# Altium PCB H_Bridge.PcbDoc
Units mm, origin at the board's own origin, x right, y up, seen from the top; angles counter-clockwise.
Board outline 40.13 x 76.88 mm, 2 copper layers (Top Layer, Bottom Layer), stack 1.58 mm thick; 14 components, 16 nets, 61 pads, 263 vias.
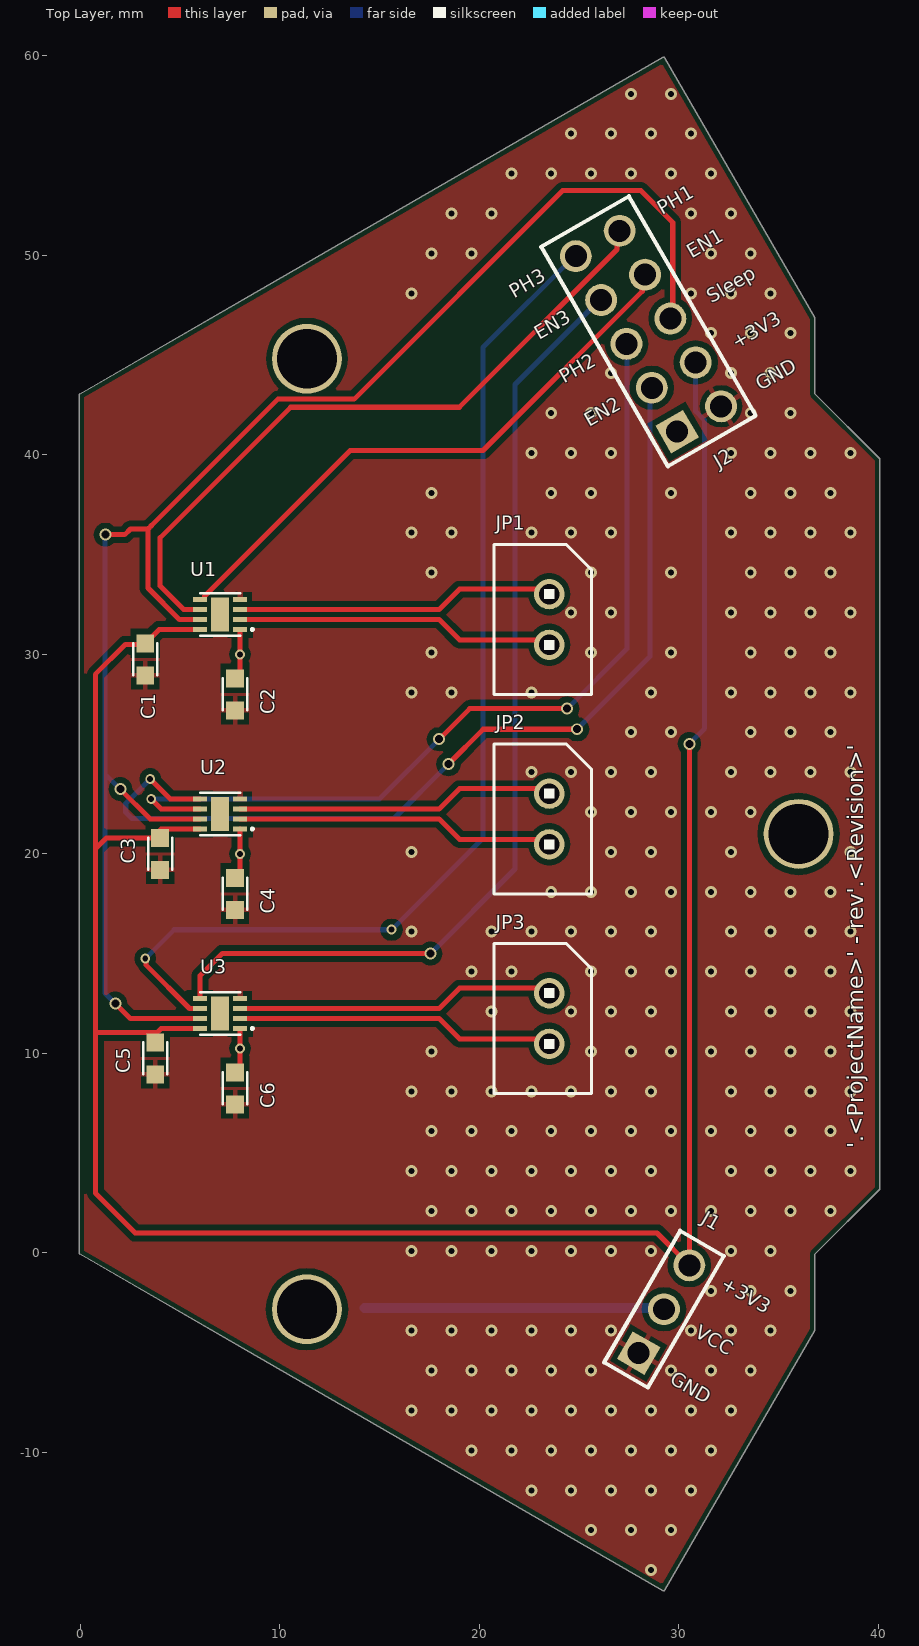
[diagram p0: Top Layer view]
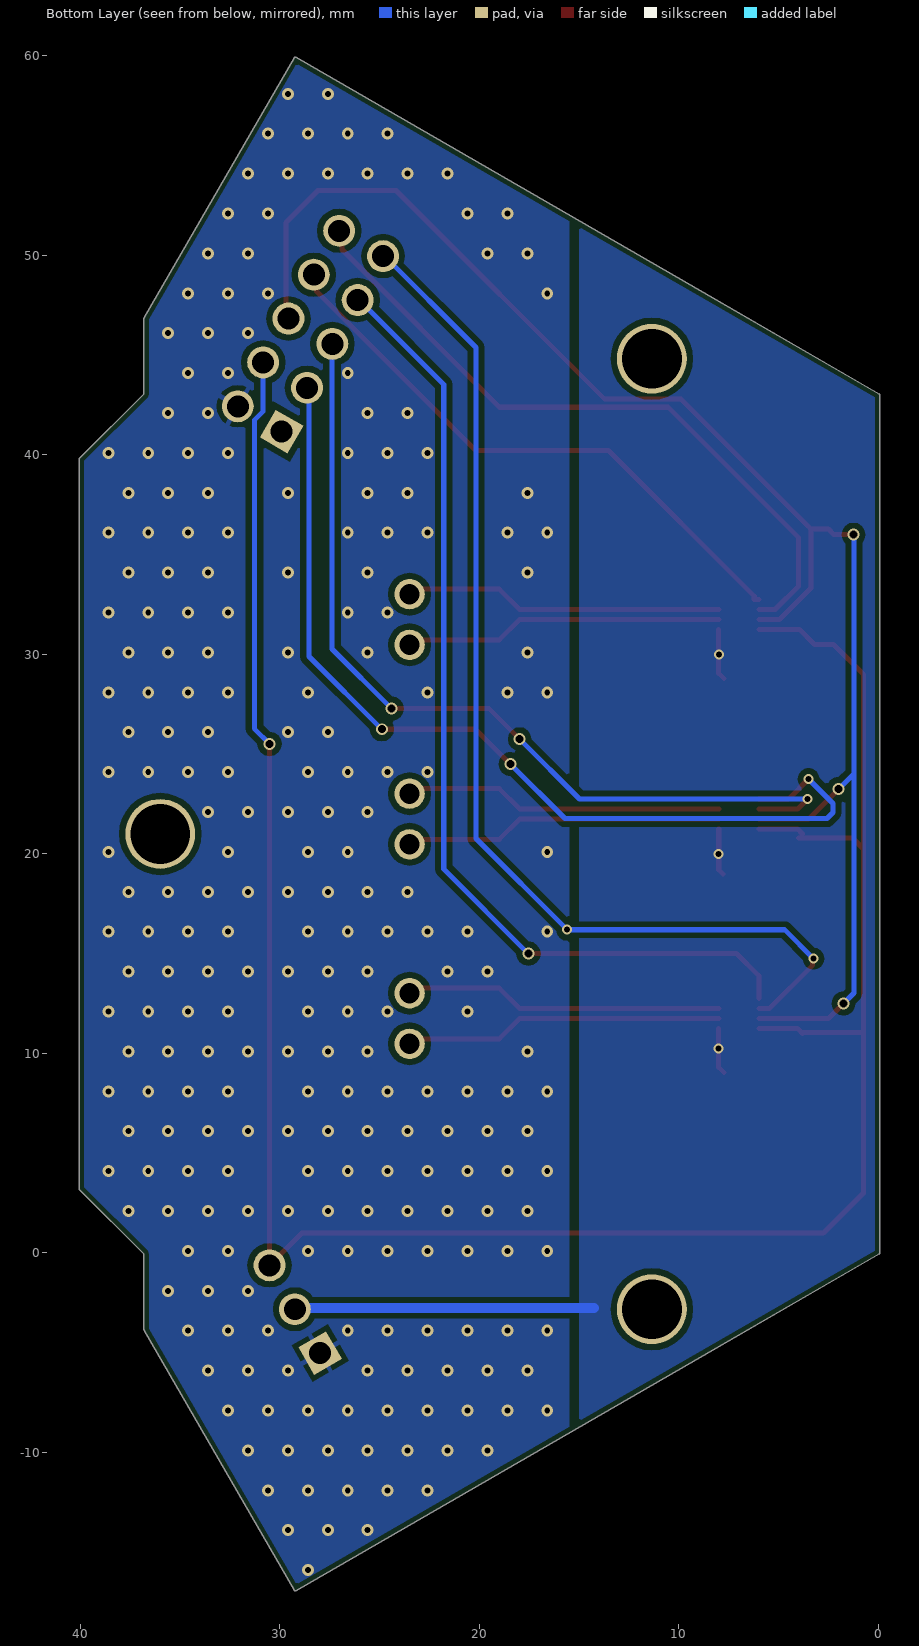
[diagram p1: Bottom Layer view, seen from below]
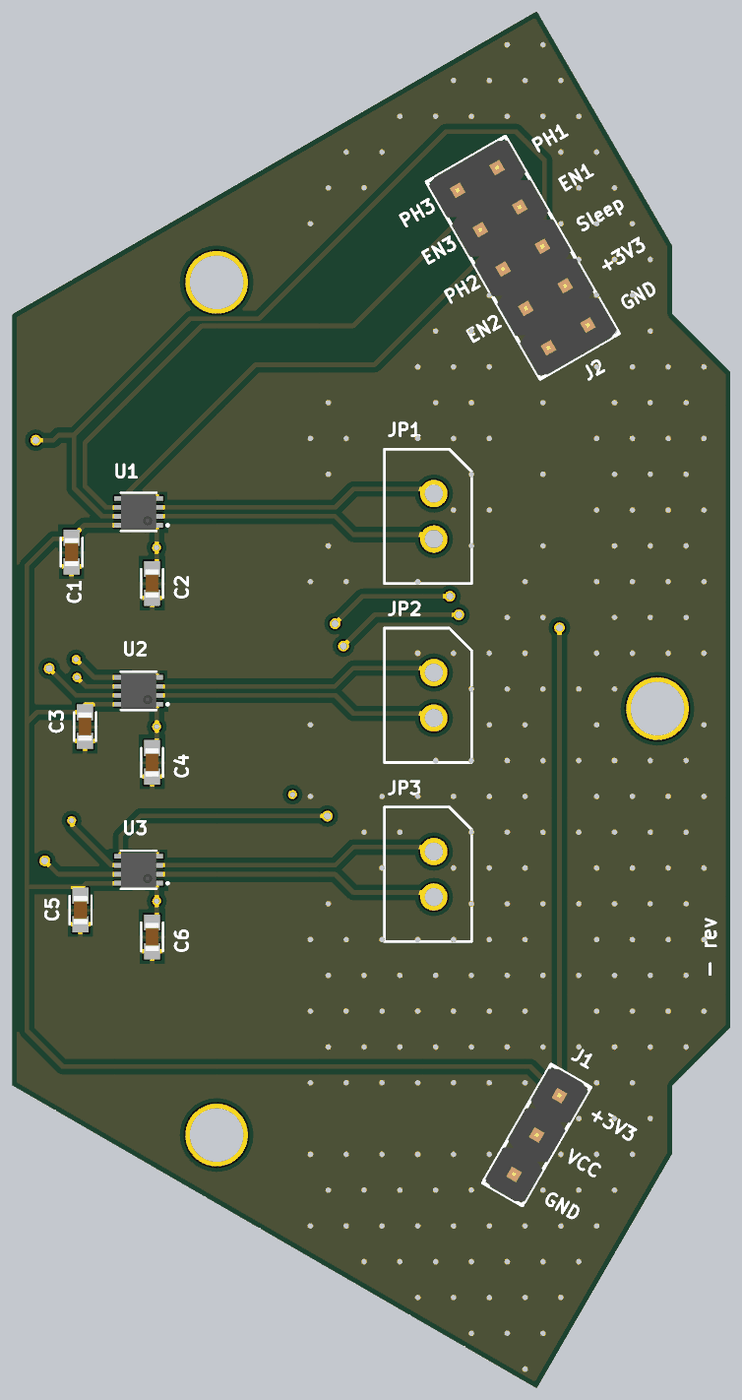
[diagram p2: 3D render of the assembled board from above, using the file's embedded part models]

## Layer stack, top to bottom
Top Solder: solder mask 0.0102, Solder Resist, Dk 3.5
Top Layer: signal copper 0.0356
Dielectric 1: dielectric 1.5086, FR-4, Dk 4.8
Bottom Layer: signal copper 0.0356
Bottom Solder: solder mask 0.0102, Solder Resist, Dk 3.5

## Board outline
-0.032,-0.055 cw(c0,0) -0.064,0 -0.064,43 cw(c0,43) -0.032,43.055 8.628,48.055 29.196,59.93 cw(c29.228,59.875) 29.284,59.907 36.805,46.878 cw(c36.75,46.847) 36.814,46.847 36.814,43.061 40.045,39.83 cw(c40,39.784) 40.064,39.784 40.064,10 40.064,3.216 cw(c40,3.216) 40.045,3.17 36.814,-0.061 36.814,-3.847 cw(c36.75,-3.847) 36.805,-3.878 29.284,-16.907 cw(c29.228,-16.875) 29.196,-16.93 8.628,-5.055

## Design rules (kind name [scope] priority, off if disabled: settings)
BoardOutlineClearance [All] p1: gap=0.254 ignorepadtopadclearanceinfootprint=FALSE except(0: Arc-SplitContinuation Track-SplitContinuation SMDPad-OutlineEdge SMDPad-SplitContinuation THPad-SplitContinuation Via-SplitContinuation Fill-SplitContinuation Poly-SplitContinuation Region-SplitContinuation Text-SplitContinuation)
Clearance Clearance_RF [InNet('WLAN_RF')] p1: gap=0.15 ignorepadtopadclearanceinfootprint=FALSE except(0: Arc-Hole Track-Hole SMDPad-Hole THPad-Hole Via-Hole Fill-Hole Poly-Hole Region-Hole Text-Hole; 0.8: Arc-Poly Track-Poly SMDPad-Poly THPad-Poly Via-Poly Fill-Poly Poly-Poly)
Clearance [All] p2: gap=0.15 ignorepadtopadclearanceinfootprint=FALSE except(0: Arc-Hole Track-Hole SMDPad-Hole THPad-Hole Via-Hole Fill-Hole Poly-Hole Region-Hole Text-Hole; 0.3: Arc-Poly Track-Poly SMDPad-Poly THPad-Poly Via-Poly Fill-Poly Poly-Poly)
DiffPairsRouting [All] p1: maxlimit=0.254 minlimit=0.25 mostfreqgap=0.25 toplayer_minwidth=0.25 toplayer_maxwidth=0.25 toplayer_prefwidth=0.25 bottomlayer_minwidth=0.25 bottomlayer_maxwidth=0.25 bottomlayer_prefwidth=0.25 maxuncoupledlength=12.7
HoleSize [All] p1: absolutevalues=TRUE maxlimit=10 minlimit=0.025 maxpercent=80.000 minpercent=20.000
MinimumSolderMaskSliver [All] p1: minsoldermaskwidth=0.04
PlaneClearance PlaneClearance_RF [InNet('WLAN_RF')] p1: clearance=0.8
PlaneClearance [All] p2: clearance=0.5
PlaneConnect [All] p1: planeconnectstyle=Relief reliefexpansion=0.508 reliefentries=2 reliefconductorwidth=0.254 reliefairgap=0.254
PolygonConnect PolygonConnect_vias [All vs IsVia] p1: connectstyle=Direct reliefconductorwidth=0.254 reliefentries=4 polygonreliefangle="90 Angle" airgapwidth=0.254
PolygonConnect [All] p2: connectstyle=Relief reliefconductorwidth=0.25 reliefentries=4 polygonreliefangle="90 Angle" airgapwidth=0.25
RoutingVias [All] p1: holewidth=0.7 width=0.5 viastyle="Through Hole" minholewidth=0.4 minwidth=0.6 maxholewidth=0.5 maxwidth=0.8
SilkToSolderMaskClearance [IsPad] p1: minsilkscreentomaskgap=0 clearancetoexposedcopper=TRUE
SolderMaskExpansion SolderMaskExpansion_Vias [IsVia] p1: expansion=-10
SolderMaskExpansion [All] p2: expansion=0.1
UnpouredPolygon [All] p1: allowunpoured=TRUE allowshelved=TRUE
Width [All] p1: maxlimit=2 minlimit=0.1 preferedwidth=0.25 minimp=50.000000 maximp=50.000000 favimp=50.000000
23 further rules are at their usual default settings.

## Components (designator, comment, footprint, x,y, rotation, side; value= is the part's Value field where it differs from the comment)
C1 "C-EUC0603" C0603 3.25,29.75 r270 top value=100nF
C2 "C-EUC0603" C0603 7.75,28 r270 top value=100nF
C3 "C-EUC0603" C0603 4,20 r270 top value=100nF
C4 "C-EUC0603" C0603 7.75,18 r270 top value=100nF
C5 "C-EUC0603" C0603 3.75,9.75 r270 top value=100nF
C6 "C-EUC0603" C0603 7.75,8.25 r270 top value=100nF
J1 "03p" 61300311121 29.25,-2.822 r60 top
J2 "10p" 61301021121 28.471,46.2 r120 top
JP1 "CONECT_BAT" CONECT_BAT_PCK 23.5,31.75 r270 top
JP2 "CONECT_BAT" CONECT_BAT_PCK 23.5,21.75 r270 top
JP3 "CONECT_BAT" CONECT_BAT_PCK 23.5,11.75 r270 top
U1 "DRV8838DSGT" SON50P200X200X80-9N 7,32 r180 top
U2 "DRV8838DSGT" SON50P200X200X80-9N 7,22 r180 top
U3 "DRV8838DSGT" SON50P200X200X80-9N 7,12 r180 top

## Footprints (in the part's own frame and the unit in brackets; to place one, negate y for a bottom-side part, rotate by r counter-clockwise, add the part's x,y. Pads: shape width x height; smd on the part's side, far side on the other; paste and mask are expansions set on the pad)
61300311121 [mm] "3 pins, 1 row, straight, gold plating"
  rect 1.6x1.6 hole 1.1: 1(-2.54,0)
  round 1.6 hole 1.1: 2(0,0) 3(2.54,0)
  silkscreen extent -3.81,-1.27 3.81,1.27, body extent -3.81,-1.27 3.81,1.27, height 8.57
61301021121 [mm] "10 pins, dual pin, straight, gold plating"
  rect 1.6x1.6 hole 1.1: 1(-5.08,1.27)
  round 1.6 hole 1.1: 2(-2.54,1.27) 3(0,1.27) 4(2.54,1.27) 5(5.08,1.27) 6(-5.08,-1.27) 7(-2.54,-1.27) 8(0,-1.27) 9(2.54,-1.27) 10(5.08,-1.27)
  silkscreen extent -6.35,-2.54 6.35,2.54, body extent -6.35,-2.54 6.35,2.54, height 8.57
C0603 [mm]
  rect 0.9x0.9 smd: 1(-0.8,0) 2(0.8,0)
  silkscreen extent -0.8,-0.61 0.8,0.61, body extent -0.8,-0.4 0.8,0.4, height 0.8
CONECT_BAT_PCK [mil]
  round 60 hole 40: 1(50,0) 2(-50,0)
  silkscreen extent -148,-109 148,83
SON50P200X200X80-9N [mm]
  rect 0.71x0.26 smd: 1(-1.005,0.75) 2(-1.005,0.25) 3(-1.005,-0.25) 4(-1.005,-0.75) 5(1.005,-0.75) 6(1.005,-0.25) 7(1.005,0.25) 8(1.005,0.75)
  rect 0.9x1.7 smd: 9(0,0)
  silkscreen extent -1.67,-1.07 1,1.07, body extent -1,-1 1,1, height 0.77

## Part data
C1 C2 C3 C4 C5 C6: Part Number=06033C104KAT2A, Família=Capacitor, Vendor=AVX
J1: library part 61300311121, "WR-PHD 2.54 mm THT Pin Header, 03p", Part Number=61300311121, Vendor="Wurth Elektronik"
J2: library part 61301021121, "WR-PHD 2.54 mm THT Dual Pin Header, 10p", Part Number=61301021121, Vendor="Wurth Elektronik"
U1 U2 U3: "1.8A Low Voltage Brushed DC Motor Driver 8-WSON -40 to 85", Package="WSON-8 Texas Instruments", Availability=Good, MF="Texas Instruments", MP=DRV8838DSGT, Price="0.98 USD", SnapEDA_Link=https://www.snapeda.com/parts/DRV8838DSGT/Texas%20Instruments/view-part/?ref=snap

## Free pads (board coordinates)
  round 3.5 hole 3: ""(11.356,-2.822) ""(11.356,44.822) ""(36,21)

## Via types
v1: diameter 0.6, hole 0.3, Top Layer to Bottom Layer, tented both sides, 247 vias
v2: diameter 0.6, hole 0.4, Top Layer to Bottom Layer, 9 vias
v3: diameter 0.5, hole 0.3, Top Layer to Bottom Layer, 4 vias
v4: diameter 0.5/0.5 (per signal layer), hole 0.3, Top Layer to Bottom Layer, 3 vias

## Nets (pads, with @x,y where several pads share a name; then routed paths per layer and width w, separated by ;. In a path a pad name is that pad's centre, name@x,y a point inside that pad or via, vN(x,y) a via of type N, cw(c..) or ccw(c..) an arc to the next point about the centre after c; other vN are vias at no path point)
+3V3: C1.1 C3.1 C5.1 J1.3 J2.7 U1.8 U2.8 U3.8 | length 120.3
  Top Layer w0.25: 0.75,11 0.8,11.05 3.75,11.05 ; 0.75,20.25 1.3,20.8 C3.1 ; 2.25,30.5 3.2,30.5 C1.1 3.95,31.25 U1.8
  Top Layer w0.254: 2.25,30.5 0.75,29 0.75,20.25 0.75,11 0.75,3 2.75,1 28.898,1 J1.3 v2(30.52,25.52) ; C5.1@3.8,11 4.05,11.25 U3.8 ; C3.1@3.8,21 4.05,21.25 U2.8
  Bottom Layer w0.254: v2(30.52,25.52) 31.281,26.281 31.281,41.742 30.841,42.182 J2.7
EN1: J2.9 U1.5 | length 29.8
  Top Layer w0.254: U1.5 6.22,32.75 6.223,32.753 6.223,32.915 13.525,40.217 20.178,40.217 28.163,48.202 28.163,48.977 J2.9@28.421,49.235
EN2: J2.2 U2.5 | length 48.5
  Top Layer w0.254: v3(3.5,23.75) 4.5,22.75 5.992,22.75 U2.5@5.995,22.753 ; v2(18.449,24.5) 18.449,24.507 20.192,26.25 v2(24.894,26.25)
  Bottom Layer w0.254: v3(3.5,23.75) 2.273,22.523 2.273,22.082 2.582,21.773 15.644,21.773 ; 15.715,21.773 18.442,24.5 v2(18.449,24.5) ; v2(24.894,26.25) 28.541,29.898 28.541,43.346 J2.2@28.761,43.565
EN3: J2.4 U3.5 | length 49.7
  Top Layer w0.254: U3.5@5.995,12.761 5.995,13.895 7.112,15.012 v2@17.547,15.012
  Bottom Layer w0.254: v2(17.547,15) 21.789,19.241 21.789,43.532 J2.4@26.221,47.965
GND: C1.2 C2.2 C3.2 C4.2 C5.2 C6.2 J1.1 J2.6 U1.4 U2.4 U3.4
  other v1: 28.6,-15.9 25.6,-13.9 27.6,-13.9 29.6,-13.9 22.6,-11.9 24.6,-11.9 26.6,-11.9 28.6,-11.9 30.6,-11.9 19.6,-9.9 21.6,-9.9 23.6,-9.9 25.6,-9.9 27.6,-9.9 29.6,-9.9 31.6,-9.9 16.6,-7.9 18.6,-7.9 20.6,-7.9 22.6,-7.9 24.6,-7.9 26.6,-7.9 28.6,-7.9 30.6,-7.9 32.6,-7.9 17.6,-5.9 19.6,-5.9 21.6,-5.9 23.6,-5.9 25.6,-5.9 29.6,-5.9 31.6,-5.9 33.6,-5.9 16.6,-3.9 18.6,-3.9 20.6,-3.9 22.6,-3.9 24.6,-3.9 26.6,-3.9 30.6,-3.9 32.6,-3.9 34.6,-3.9 31.6,-1.9 33.6,-1.9 35.6,-1.9 16.6,0.1 18.6,0.1 20.6,0.1 22.6,0.1 24.6,0.1 26.6,0.1 28.6,0.1 32.6,0.1 34.6,0.1 17.6,2.1 19.6,2.1 21.6,2.1 23.6,2.1 25.6,2.1 27.6,2.1 29.6,2.1 31.6,2.1 33.6,2.1 35.6,2.1 37.6,2.1 16.6,4.1 18.6,4.1 20.6,4.1 22.6,4.1 24.6,4.1 26.6,4.1 28.6,4.1 32.6,4.1 34.6,4.1 36.6,4.1 38.6,4.1 17.6,6.1 19.6,6.1 21.6,6.1 23.6,6.1 25.6,6.1 27.6,6.1 29.6,6.1 31.6,6.1 33.6,6.1 35.6,6.1 37.6,6.1 16.6,8.1 18.6,8.1 20.6,8.1 22.6,8.1 24.6,8.1 26.6,8.1 28.6,8.1 32.6,8.1 34.6,8.1 36.6,8.1 38.6,8.1 17.6,10.1 25.6,10.1 27.6,10.1 29.6,10.1 31.6,10.1 33.6,10.1 35.6,10.1 37.6,10.1 20.6,12.1 24.6,12.1 26.6,12.1 28.6,12.1 32.6,12.1 34.6,12.1 36.6,12.1 38.6,12.1 19.6,14.1 21.6,14.1 25.6,14.1 27.6,14.1 29.6,14.1 31.6,14.1 33.6,14.1 35.6,14.1 37.6,14.1 16.6,16.1 20.6,16.1 22.6,16.1 24.6,16.1 26.6,16.1 28.6,16.1 32.6,16.1 34.6,16.1 36.6,16.1 38.6,16.1 23.6,18.1 25.6,18.1 27.6,18.1 29.6,18.1 31.6,18.1 33.6,18.1 35.6,18.1 37.6,18.1 16.6,20.1 26.6,20.1 28.6,20.1 32.6,20.1 38.6,20.1 25.6,22.1 27.6,22.1 29.6,22.1 31.6,22.1 33.6,22.1 22.6,24.1 24.6,24.1 26.6,24.1 28.6,24.1 32.6,24.1 34.6,24.1 36.6,24.1 38.6,24.1 27.6,26.1 29.6,26.1 33.6,26.1 35.6,26.1 37.6,26.1 16.6,28.1 18.6,28.1 22.6,28.1 28.6,28.1 32.6,28.1 34.6,28.1 36.6,28.1 38.6,28.1 17.6,30.1 25.6,30.1 29.6,30.1 33.6,30.1 35.6,30.1 37.6,30.1 24.6,32.1 26.6,32.1 32.6,32.1 34.6,32.1 36.6,32.1 38.6,32.1 17.6,34.1 25.6,34.1 29.6,34.1 33.6,34.1 35.6,34.1 37.6,34.1 16.6,36.1 18.6,36.1 22.6,36.1 24.6,36.1 26.6,36.1 32.6,36.1 34.6,36.1 36.6,36.1 38.6,36.1 17.6,38.1 23.6,38.1 25.6,38.1 29.6,38.1 33.6,38.1 35.6,38.1 37.6,38.1 22.6,40.1 24.6,40.1 26.6,40.1 32.6,40.1 34.6,40.1 36.6,40.1 38.6,40.1 23.6,42.1 25.6,42.1 33.6,42.1 35.6,42.1 26.6,44.1 32.6,44.1 34.6,44.1 31.6,46.1 33.6,46.1 35.6,46.1 16.6,48.1 30.6,48.1 32.6,48.1 34.6,48.1 17.6,50.1 19.6,50.1 31.6,50.1 33.6,50.1 18.6,52.1 20.6,52.1 30.6,52.1 32.6,52.1 21.6,54.1 23.6,54.1 25.6,54.1 27.6,54.1 29.6,54.1 31.6,54.1 24.6,56.1 26.6,56.1 28.6,56.1 30.6,56.1 27.6,58.1 29.6,58.1
OUT1_1: JP1.1 U1.2 | length 15.7
  Top Layer w0.254: U1.2 17.98,31.75 19,30.73 JP1.1@23.25,30.73
OUT1_2: JP2.1 U2.2 | length 15.7
  Top Layer w0.254: U2.2 17.98,21.75 19,20.73 JP2.1@23.25,20.73
OUT1_3: JP3.1 U3.2 | length 16
  Top Layer w0.254: U3.2 17.98,11.75 19,10.73 23.25,10.73 JP3.1
OUT2_1: JP1.2 U1.3 | length 15.7
  Top Layer w0.254: U1.3 17.98,32.25 19,33.27 JP1.2@23.25,33.27
OUT2_2: JP2.2 U2.3 | length 16
  Top Layer w0.254: U2.3 17.98,22.25 19,23.27 23.25,23.27 JP2.2
OUT2_3: JP3.2 U3.3 | length 15.7
  Top Layer w0.254: U3.3 17.98,12.25 19,13.27 JP3.2@23.25,13.27
PH1: J2.10 U1.6 | length 35
  Top Layer w0.254: U1.6 5.179,32.25 3.996,33.433 3.996,35.849 10.538,42.391 18.991,42.391 26.893,50.293 26.893,51.177 J2.10@27.151,51.435
PH2: J2.3 U2.6 | length 45.1
  Top Layer w0.254: v3(3.55,22.75) 4.05,22.25 U2.6 ; v2(17.98,25.75) 19.511,27.281 v2(24.396,27.281)
  Bottom Layer w0.254: v3(3.55,22.75) 14.98,22.75 v2(17.98,25.75) ; v2(24.396,27.281) 27.391,30.276 27.391,45.665 J2.3@27.491,45.765
PH3: J2.5 U3.6 | length 54.7
  Top Layer w0.254: v3(3.25,14.75) 3.297,14.703 3.297,14.424 5.471,12.25 U3.6
  Bottom Layer w0.254: v3(3.25,14.75) 4.7,16.2 v3(15.6,16.2) 20.17,20.77 20.17,45.384 J2.5@24.951,50.165
sleep: J2.8 U1.7 U2.7 U3.7 | length 81.1
  Top Layer w0.25: v2(1.25,36) 2.222,36 2.506,36.284 3.384,36.284 3.55,36.45 ; v2(1.75,12.5) 2.5,11.75 U3.7 ; v2(2,23.25) 3.5,21.75 U2.7
  Top Layer w0.254: 3.384,36.284 3.384,33.326 4.96,31.75 U1.7 ; 3.55,36.45 9.895,42.795 13.723,42.795 24.178,53.25 28.09,53.25 29.691,51.649 J2.8@29.691,47.035
  Bottom Layer w0.25: v2(1.25,36) 1.225,35.975 1.225,24.025 ; v2(1.75,12.5) 1.225,13.025 1.225,24.025 ; v2(2,23.25) 1.225,24.025
Vcc: C2.1 C4.1 C6.1 J1.2 U1.1 U2.1 U3.1 | length 22
  Top Layer w0.25: C6.1 8.005,9.305 v4(8.005,10.25) U3.1 ; C2.1 8.005,29.055 U1.1
  Top Layer w0.254: C4.1@7.8,19 8.005,19.205 v4(8.005,20) U2.1@8.005,21.239
  Bottom Layer w0.5: 14.25,-2.75 J1.2@29.063,-2.75
  other v4: 8,30
pads on no net: J2.1 U1.9 U2.9 U3.9

## Polygon pours and split planes (outlines as drawn)
GND on Bottom Layer "GND" (solid, remove dead copper, pour order 4): 31.638,55.829 33.653,52.338 36.75,46.882 36.75,43 40,39.75 40,3.152 36.75,-0.098 36.75,-3.974 33.141,-10.226 29.371,-16.756 15.5,-9.023 15.5,52.023 29.196,59.82
Vcc on Bottom Layer "Vcc" (solid, pour order 2): 0.023,43 15,51.55 15,48.141 15,-5.859 15,-8.734 -0.141,0.141
GND on Top Layer "GND" (solid, remove dead copper, pour order 0): 40,3.204 40,3.189 36.75,-0.061 36.75,-3.783 35.281,-6.518 34.832,-7.297 29.242,-16.846 7.767,-4.558 0,0 0,43 29.242,60 32.645,54.084 36.75,46.783 36.75,43 40,39.721 40,38 40,37.87

## Silkscreen, mask and mechanical layers (free items; w line width, h text height)
Top Overlay:
  text "PH1" at 29.164,52.023 h0.7 r30
  text "EN1" at 30.652,49.845 h0.7 r30
  text "PH3" at 21.75,47.82 h0.7 r30
  text "Sleep" at 31.638,47.59 h0.7 r30
  text "EN3" at 23,45.75 h0.7 r30
  text "+3V3" at 32.9,45.3 h0.7 r30
  text "PH2" at 24.257,43.565 h0.7 r30
  text "GND" at 34.1,43.197 h0.7 r30
  text "EN2" at 25.5,41.375 h0.7 r30
  text "'.<ProjectName>' - rev'.<Revision>'" at 39.25,5.25 h0.8 r90
  text "+3V3" at 32.037,-1.75 h0.7 r330
  text "VCC" at 30.75,-4.175 h0.7 r330
  text "GND" at 29.498,-6.5 h0.7 r330
Mechanical 1:
  lines w0.127: 36.75,-3.847 36.75,-0.034 ; 36.75,-3.847 36.75,-0.034 ; 36.75,-3.847 29.228,-16.875 8.66,-5 0,0 0,43 8.66,48 29.228,59.875 36.75,46.847 36.75,43.034 40,39.784 40,36.5 40,10 40,3.216 36.75,-0.034